# Altium PCB ARMBrain.PcbDoc
Units mil, origin at the board's own origin, x right, y up, seen from the top; angles counter-clockwise.
Board outline 6000 x 4000 mil, 2 copper layers (Top Layer, Bottom Layer); 65 components, 78 nets, 383 pads, 0 vias.
Unrouted connection lines stored in the file: 120.
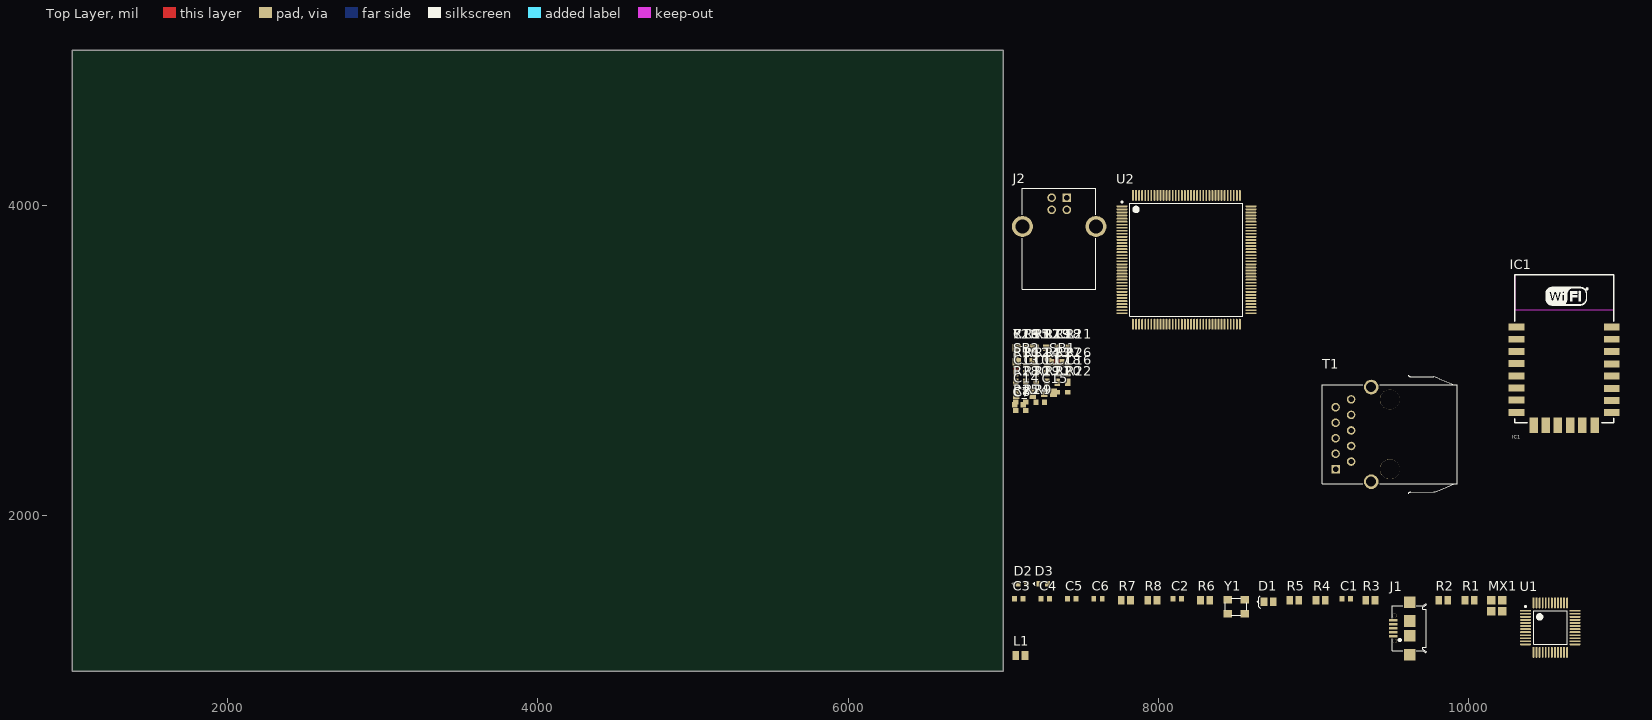
[diagram p0: Top Layer view]
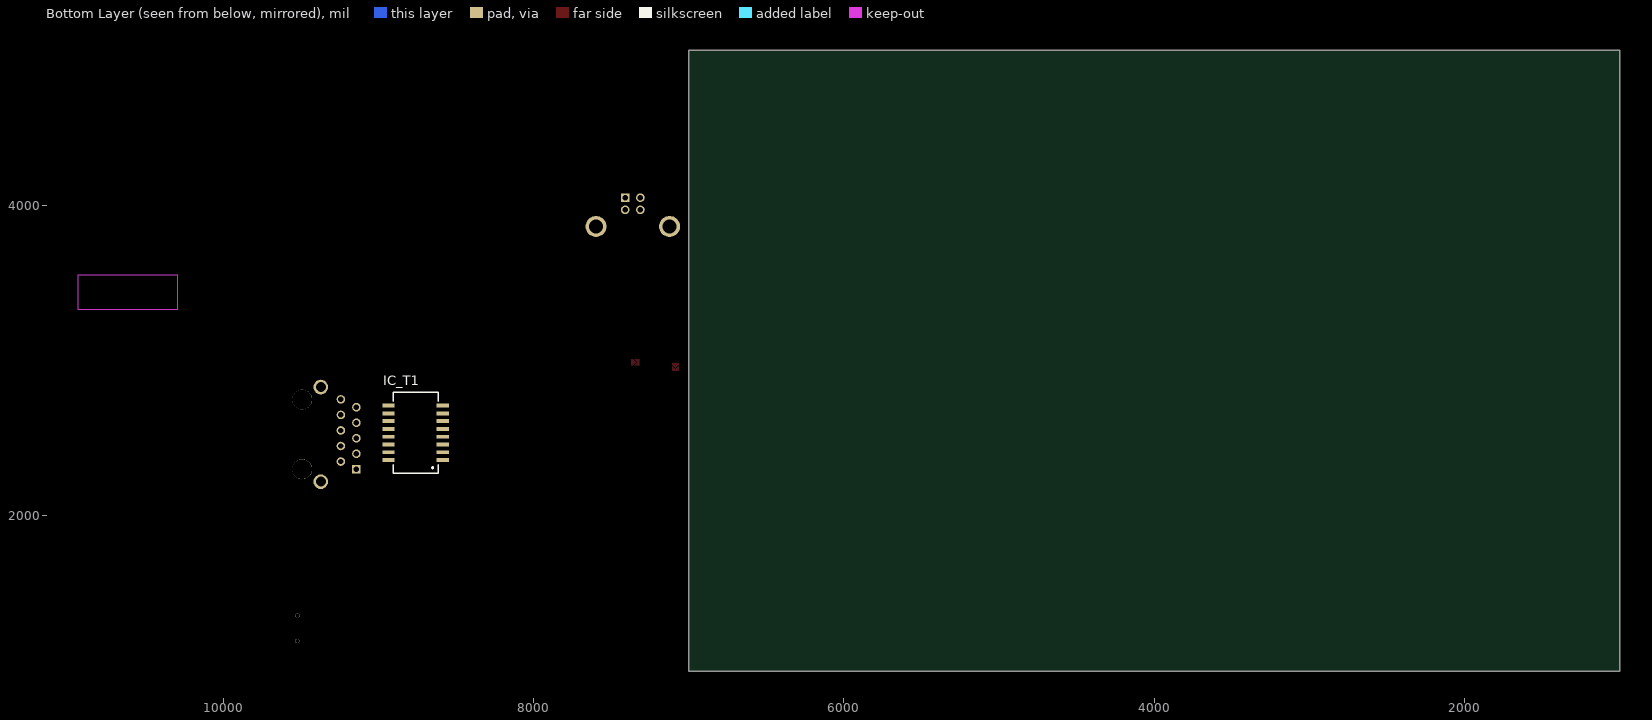
[diagram p1: Bottom Layer view, seen from below]

## Layer stack, top to bottom
Top Solder: solder mask 0.4, Solder Resist, Dk 3.5
Top Layer: signal copper 1.4
Dielectric 1: dielectric 12.6, FR-4, Dk 4.8
Bottom Layer: signal copper 1.4
Bottom Solder: solder mask 0.4, Solder Resist, Dk 3.5

## Board outline
1000,1000 7000,1000 7000,5000 1000,5000

## Design rules (kind name [scope] priority, off if disabled: settings)
Clearance [All] p1: gap=10
DiffPairsRouting [All] p1: maxlimit=10 minlimit=10 mostfreqgap=10 toplayer_minwidth=15 toplayer_maxwidth=15 toplayer_prefwidth=15 bottomlayer_minwidth=15 bottomlayer_maxwidth=15 bottomlayer_prefwidth=15 maxuncoupledlength=500
PolygonConnect [All] p1: connectstyle=Relief reliefconductorwidth=10 reliefentries=4 polygonreliefangle="90 Angle" airgapwidth=10
RoomDefinition MCU [InComponentClass('MCU')] p1: confinementstyle=ConfineIn formatcopy=TRUE lockcomponents=FALSE outline 0,0 2000,0 2000,1000 0,1000
RoomDefinition Ethernet [InComponentClass('Ethernet')] p2: confinementstyle=ConfineIn formatcopy=TRUE lockcomponents=FALSE outline 7045,1060 7175,1060 7175,1240 7045,1240
RoomDefinition ESP8266 [InComponentClass('ESP8266')] p3: confinementstyle=ConfineIn formatcopy=TRUE lockcomponents=FALSE outline 0,0 2000,0 2000,1000 0,1000
RoomDefinition Debugging [InComponentClass('Debugging')] p4: confinementstyle=ConfineIn formatcopy=TRUE lockcomponents=FALSE outline 0,0 2000,0 2000,1000 0,1000
RoutingVias [All] p1: holewidth=28 width=50 viastyle="Through Hole" minholewidth=28 minwidth=50 maxholewidth=28 maxwidth=50
SolderMaskExpansion [All] p1: expansion=4
Width [All] p1: maxlimit=10 minlimit=10 preferedwidth=10
28 further rules are at their usual default settings.

## Classes and differential pairs
component class MCU: J2 U2
component class Ethernet: C8 C9 C10 C11 C12 C13 C14 C15 C16 C17 C18 C19 CN1 D2 D3 IC_T1 L1 R9 R10 R11 R12 R13 R14 R15 R16 R17 R18 R19 R20 R21 R22 R23 R24 R25 R26 R27 R28 R29 R30 SB1 SB2 T1 U3 U4 U5 X1 Y2
component class ESP8266: C7 IC1
component class Debugging: C1 C2 C3 C4 C5 C6 D1 J1 MX1 R1 R2 R3 R4 R5 R6 R7 R8 U1 Y1
differential pair TD: +TD_P -TD_N
differential pair RD: +RD_P -RD_N

## Components (designator, comment, footprint, x,y, rotation, side; value= is the part's Value field where it differs from the comment)
C1 "Cap" C0603 9210,1465 r0 top
C2 "Cap" C0603 8120,1465 r0 top
C3 "Cap" C0603 7100,1465 r0 top
C4 "Cap" C0603 7270,1465 r0 top
C5 "Cap" C0603 7440,1465 r0 top
C6 "Cap" C0603 7610,1465 r0 top
C7 "Cap" C0603 7100,2715 r0 top
C8 "100nF" C0603 7104.21,2715.78 r0 top
C9 "12pF" C0603 7171.46,3086.38 r0 top
C10 "470pF" C0603 7145.87,2895.54 r90 top
C11 "100nF" C0603 7213.11,2895.54 r90 top
C12 "100nF" C0603 7358.67,3060.79 r90 top
C13 "100nF" C0603 7078.62,2895.54 r90 top
C14 "1nF 2000V" C1206 7135.71,2786.96 r0 top
C15 "Cap" C0805 7293.5,2792.87 r0 top
C16 "1uF_X5R_0603" C0603 7414.84,2895.54 r90 top
C17 "100nF" C0603 7280.35,2895.54 r90 top
C18 "100nF" C0603 7347.6,2895.54 r90 top
C19 "12pF" C0603 7078.62,3060.79 r90 top
D1 "LED" 0805_Led 8710,1445 r0 top
D2 "LED_Green" 0603_LED 7121.97,1561.73 r0 top
D3 "LED_Yellow" 0603_LED 7258.15,1561.73 r0 top
IC1 "ESP8266 ESP-12-E" "ESP8266 ESP-12-E" 10960,2570 r0 top
IC_T1 "ETH_Transf_11FB-05NL" "ETH_Transf 11FB-05NL" 8760,2535 r0 bottom
J1 "Micro USB 2.0 SMT Type B Horizontal 5 Contacts" 629105136821 9610,1275 r90 top
J2 "USB 2.0 Type B Horizontal" 61400416121 7360,3785 r0 top
L1 "Ferrite_Bead" 0805 7110,1100 r0 top
MX1 "Matrix_Selector" Matrix_Selector 10180,1420 r0 top
R1 "Res" R0805 10005,1455 r0 top
R2 "Res" R0805 9835,1455 r0 top
R3 "Res" R0805 9365,1455 r0 top
R4 "Res" R0805 9045,1455 r0 top
R5 "Res" R0805 8875,1455 r0 top
R6 "Res" R0805 8300,1455 r0 top
R7 "Res" R0805 7790,1455 r0 top
R8 "Res" R0805 7960,1455 r0 top
R9 "50" R0603 7238.7,2731.1 r0 top
R10 "50" R0603 7078.62,2942.36 r90 top
R11 "10K" R0603 7414.84,3060.79 r90 top
R12 "10K" R0603 7145.87,2942.36 r90 top
R13 "10K" R0603 7280.35,2942.36 r90 top
R14 "50" R0603 7213.11,2942.36 r90 top
R15 "50" R0603 7145.87,3060.79 r90 top
R16 "33" R0603 7078.62,3060.79 r90 top
R17 "33" R0603 7213.11,3060.79 r90 top
R18 "10K" R0603 7347.6,3060.79 r90 top
R19 "75" R0603 7280.35,3060.79 r90 top
R20 "75" R0603 7347.6,2823.94 r90 top
R21 "75" R0603 7280.35,2823.94 r90 top
R22 "75" R0603 7414.84,2823.94 r90 top
R23 "12K1" R0805 7281.58,3052.91 r90 top
R24 "33" R0603 7145.87,2705.51 r90 top
R25 "1K5" R0603 7078.62,2705.51 r90 top
R26 "10K" R0603 7414.84,2942.36 r90 top
R27 "33" R0603 7347.6,2942.36 r90 top
R28 "270" R0603 7078.62,2823.94 r90 top
R29 "10K" R0603 7213.11,2823.94 r90 top
R30 "270" R0603 7145.87,2823.94 r90 top
SB1 "Open" SB_0603 7345,2990 r0 top
SB2 "Open" SB_0603 7085,2960 r90 top
T1 "RJ45" RJ45_ETH 9490,2525 r90 top
U1 "STM32F103C8T6" STM-LQFP48_N 10525,1280 r0 top
U2 "STM32F407ZGT6" STM-LQFP144_N 8180,3650 r0 top
Y1 "XTAL 8MHz" SMD-3225_4P 8500,1415 r0 top
Y2 "XTAL_25MHz" SMD-3225_4P 7141.56,3037.38 r0 top

## Footprints (in the part's own frame and the unit in brackets; to place one, negate y for a bottom-side part, rotate by r counter-clockwise, add the part's x,y. Pads: shape width x height; smd on the part's side, far side on the other; paste and mask are expansions set on the pad)
0603_LED [mm] "0603, Body 1.6x0.8mm, IPC High Density"
  rect 0.8x0.9 smd: 1(-0.7,0) 2(0.7,0)
  silkscreen extent -1.65,-0.25 -1.4,0.25, body extent -0.87,-0.48 0.87,0.48, height 1.3
0805 [mm] "Chip Capacitor, Body 2.0x1.3mm, IPC High Density"
  rect 1.1x1.4 smd: 1(-0.75,0) 2(0.75,0)
  body extent -1.1,-0.72 1.1,0.72, height 1.4
0805_Led [mm] "Chip Capacitor, Body 2.0x1.3mm, IPC High Density"
  rect 1.1x1.4 smd: 1(-0.75,0) 2(0.75,0)
  silkscreen extent -1.91,-1.02 -1.4,1.02, body extent -1.1,-0.72 1.1,0.72, height 1.4
61400416121 [mm] "USB 2.0 Type B Horizontal"
  rect 1.42x1.42 hole 0.92: 1(1.25,6.74)
  round 1.42 hole 0.92: 2(-1.25,6.74) 3(-1.25,4.74) 4(1.25,4.74)
  round 3.45 hole 2.3: Shell(-6.02,2.03) Shell(6.02,2.03)
  silkscreen extent -6.02,-8.25 6.02,8.25, body extent -7.48,-8.25 7.48,8.25, height 11.1
629105136821 [mm] "Micro USB 2.0 SMT Type B Horizontal 5 Contacts"
  rect 0.4x1.35 smd: 1(-1.3,2.475) 2(-0.65,2.475) 3(0,2.475) 4(0.65,2.475) 5(1.3,2.475)
  rect 1.9x1.9 smd: Shell(-4.3,-0.2) Shell(-1.2,-0.2) Shell(1.2,-0.2) Shell(4.3,-0.2)
  round 0.7 hole 0.7 unplated: ""(-2.075,2.25) ""(2.075,2.25)
  silkscreen extent -4,-2.95 4,2.65, body extent -4,-2.95 4,2.97, height 2.75
C0603 [mm] "0603, Body 1.6x0.8mm, IPC High Density"
  rect 0.8x0.9 smd: 1(-0.7,0) 2(0.7,0)
  body extent -0.87,-0.48 0.87,0.48, height 1.3
C0805 [mm] "Chip Capacitor, Body 2.0x1.3mm, IPC High Density"
  rect 1.1x1.4 smd: 1(-0.75,0) 2(0.75,0)
  body extent -1.1,-0.72 1.1,0.72, height 1.4
C1206 [mm] "Chip Capacitor, Body 3.2x1.6mm, IPC High Density"
  rect 1.1x1.7 smd: 1(-1.35,0) 2(1.35,0)
  silkscreen extent -0.4,-0.75 0.4,0.75, body extent -1.7,-0.9 1.7,0.9, height 1.3
"ESP8266 ESP-12-E" [mil] "ESP8266 ESP-12-E"
  rect 100x45 smd: 1(-653,646) 2(-653,568) 3(-653,489) 4(-653,411) 5(-653,331) 6(-653,253) 7(-653,175) 8(-653,96) 15(-38,95) 16(-38,174) 17(-38,252) 18(-39,331) 19(-39,410) 20(-39,488) 21(-39,568) 22(-39,646)
  rect 55x100 smd: 9(-543,14) 10(-465,14) 11(-387,14) 12(-307,14) 13(-229,14) 14(-149,14)
  Keep-Out Layer region: -664,759 -25,759 -25,984 -664,984
  silkscreen extent -665,30 -25,985, body extent -661,35 -31,980, height 86
"ETH_Transf 11FB-05NL" [mm] "RJ45 Ethernet transformer [11FB-05NL]"
  rect 2x0.635 smd: 1(-4.445,4.445) 2(-4.445,3.175) 3(-4.445,1.905) 4(-4.445,0.635) 5(-4.445,-0.635) 6(-4.445,-1.905) 7(-4.445,-3.175) 8(-4.445,-4.445) 9(4.445,-4.445) 10(4.445,-3.175) 11(4.445,-1.905) 12(4.445,-0.635) 13(4.445,0.635) 14(4.445,1.905) 15(4.445,3.175) 16(4.445,4.445)
  silkscreen extent -3.68,-6.6 3.68,6.6
Matrix_Selector [mil] "Selector for Crossing RXTX etc"
  rect 55.12x55.12 smd: 1(-35,35) 2(35,-35) 3(35,35) 4(-35,-35)
R0603 [mm] "0603, Body 1.6x0.8mm, IPC High Density"
  rect 0.8x0.9 smd: 1(-0.7,0) 2(0.7,0)
  body extent -0.87,-0.48 0.87,0.48, height 1.3
R0805 [mm] "Chip Resistor, Body 2.0x1.3mm, IPC High Density"
  rect 1.1x1.4 smd: 1(-0.75,0) 2(0.75,0)
  body extent -1.1,-0.72 1.1,0.72, height 1.4
RJ45_ETH [mm] "LAN Transformer, body 21.84x16.13mm"
  round 1.4 hole 0.89: 1(-4.445,6.33) 2(-3.175,8.87) 3(-1.905,6.33) 4(-0.635,8.87) 5(0.635,6.33) 6(1.905,8.87) 7(3.175,6.33) 8(4.445,8.87) B2(5.715,6.33)
  rect 1.4x1.4 hole 0.89: B1(-5.715,8.87)
  round 3.25 hole 3.25 unplated: MH1(-5.715,-0.02) MH2(5.715,-0.02)
  round 2.4 hole 1.63: S1(-7.745,3.03) S2(7.745,3.03)
  silkscreen extent -9.68,-11.02 9.68,11.02, body extent -9.67,-10.94 9.67,10.9, height 15.8
SB_0603 [mil] "Jumper"
  rect 32x40 smd: 1(33.75,0) 2(-33.75,0)
  Top Layer region: -26.25,0 -16.25,0 3.75,-20 -26.25,-20
  Top Layer region: -26.25,0 -16.25,0 3.75,20 -26.25,20
  Top Layer region: 23.75,20 13.75,20 -6.25,0 13.75,-20 23.75,-20
SMD-3225_4P [mil]
  rect 55.12x47.24 smd: 1(-55,-45) 2(55,-45) 3(55,45) 4(-55,45)
  silkscreen extent -70,-55 70,55
STM-LQFP48_N [mm] "QFP, 48-Leads, Body 7x7mm, Pitch 0.5mm, IPC Medium Density"
  oval 1.8x0.3 smd: 1(-4.05,2.75) 2(-4.05,2.25) 3(-4.05,1.75) 4(-4.05,1.25) 5(-4.05,0.75) 6(-4.05,0.25) 7(-4.05,-0.25) 8(-4.05,-0.75) 9(-4.05,-1.25) 10(-4.05,-1.75) 11(-4.05,-2.25) 12(-4.05,-2.75) 25(4.05,-2.75) 26(4.05,-2.25) 27(4.05,-1.75) 28(4.05,-1.25) 29(4.05,-0.75) 30(4.05,-0.25) 31(4.05,0.25) 32(4.05,0.75) 33(4.05,1.25) 34(4.05,1.75) 35(4.05,2.25) 36(4.05,2.75)
  oval 0.3x1.8 smd: 13(-2.75,-4.05) 14(-2.25,-4.05) 15(-1.75,-4.05) 16(-1.25,-4.05) 17(-0.75,-4.05) 18(-0.25,-4.05) 19(0.25,-4.05) 20(0.75,-4.05) 21(1.25,-4.05) 22(1.75,-4.05) 23(2.25,-4.05) 24(2.75,-4.05) 37(2.75,4.05) 38(2.25,4.05) 39(1.75,4.05) 40(1.25,4.05) 41(0.75,4.05) 42(0.25,4.05) 43(-0.25,4.05) 44(-0.75,4.05) 45(-1.25,4.05) 46(-1.75,4.05) 47(-2.25,4.05) 48(-2.75,4.05)
  silkscreen extent -4.17,-2.75 2.75,3.57, body extent -3.5,-3.5 3.5,3.5, height 1.6
STM-LQFP144_N [mm] "Thin QFP, 144-Leads, Body 20x20mm, Pitch 0.5mm, IPC Medium Density"
  oval 1.8x0.3 smd: 1(-10.55,8.75) 2(-10.55,8.25) 3(-10.55,7.75) 4(-10.55,7.25) 5(-10.55,6.75) 6(-10.55,6.25) 7(-10.55,5.75) 8(-10.55,5.25) 9(-10.55,4.75) 10(-10.55,4.25) 11(-10.55,3.75) 12(-10.55,3.25) 13(-10.55,2.75) 14(-10.55,2.25) 15(-10.55,1.75) 16(-10.55,1.25) 17(-10.55,0.75) 18(-10.55,0.25) 19(-10.55,-0.25) 20(-10.55,-0.75) 21(-10.55,-1.25) 22(-10.55,-1.75) 23(-10.55,-2.25) 24(-10.55,-2.75) 25(-10.55,-3.25) 26(-10.55,-3.75) 27(-10.55,-4.25) 28(-10.55,-4.75) 29(-10.55,-5.25) 30(-10.55,-5.75) 31(-10.55,-6.25) 32(-10.55,-6.75) 33(-10.55,-7.25) 34(-10.55,-7.75) 35(-10.55,-8.25) 36(-10.55,-8.75) 73(10.55,-8.75) 74(10.55,-8.25) 75(10.55,-7.75) 76(10.55,-7.25) 77(10.55,-6.75) 78(10.55,-6.25) 79(10.55,-5.75) 80(10.55,-5.25) 81(10.55,-4.75) 82(10.55,-4.25) 83(10.55,-3.75) 84(10.55,-3.25) 85(10.55,-2.75) 86(10.55,-2.25) 87(10.55,-1.75) 88(10.55,-1.25) 89(10.55,-0.75) 90(10.55,-0.25) 91(10.55,0.25) 92(10.55,0.75) 93(10.55,1.25) 94(10.55,1.75) 95(10.55,2.25) 96(10.55,2.75) 97(10.55,3.25) 98(10.55,3.75) 99(10.55,4.25) 100(10.55,4.75) 101(10.55,5.25) 102(10.55,5.75) 103(10.55,6.25) 104(10.55,6.75) 105(10.55,7.25) 106(10.55,7.75) 107(10.55,8.25) 108(10.55,8.75)
  oval 0.3x1.8 smd: 37(-8.75,-10.55) 38(-8.25,-10.55) 39(-7.75,-10.55) 40(-7.25,-10.55) 41(-6.75,-10.55) 42(-6.25,-10.55) 43(-5.75,-10.55) 44(-5.25,-10.55) 45(-4.75,-10.55) 46(-4.25,-10.55) 47(-3.75,-10.55) 48(-3.25,-10.55) 49(-2.75,-10.55) 50(-2.25,-10.55) 51(-1.75,-10.55) 52(-1.25,-10.55) 53(-0.75,-10.55) 54(-0.25,-10.55) 55(0.25,-10.55) 56(0.75,-10.55) 57(1.25,-10.55) 58(1.75,-10.55) 59(2.25,-10.55) 60(2.75,-10.55) 61(3.25,-10.55) 62(3.75,-10.55) 63(4.25,-10.55) 64(4.75,-10.55) 65(5.25,-10.55) 66(5.75,-10.55) 67(6.25,-10.55) 68(6.75,-10.55) 69(7.25,-10.55) 70(7.75,-10.55) 71(8.25,-10.55) 72(8.75,-10.55) 109(8.75,10.55) 110(8.25,10.55) 111(7.75,10.55) 112(7.25,10.55) 113(6.75,10.55) 114(6.25,10.55) 115(5.75,10.55) 116(5.25,10.55) 117(4.75,10.55) 118(4.25,10.55) 119(3.75,10.55) 120(3.25,10.55) 121(2.75,10.55) 122(2.25,10.55) 123(1.75,10.55) 124(1.25,10.55) 125(0.75,10.55) 126(0.25,10.55) 127(-0.25,10.55) 128(-0.75,10.55) 129(-1.25,10.55) 130(-1.75,10.55) 131(-2.25,10.55) 132(-2.75,10.55) 133(-3.25,10.55) 134(-3.75,10.55) 135(-4.25,10.55) 136(-4.75,10.55) 137(-5.25,10.55) 138(-5.75,10.55) 139(-6.25,10.55) 140(-6.75,10.55) 141(-7.25,10.55) 142(-7.75,10.55) 143(-8.25,10.55) 144(-8.75,10.55)
  silkscreen extent -10.67,-9.25 9.25,9.57, body extent -10,-10 10,10, height 1.6

## Part data
C1 C2 C3 C4 C5 C6 C7 C15: "Capacitor"
C8 C9 C10 C11 C12 C13 C17 C18 C19: library part Capacitor_ST, "Capacitor 0402 / 0603 / 0805"
C14: library part Capacitor_ST, "Capacitor 0402 / 0603 / 0805/ 1206"
C16: library part "CAP SMD 0603  X5R 1µF 25V 10%", "0603  X5R 1µF"
D1: "SMD LED"
D2 D3: library part LED, "SMD LED"
J1: "Micro USB 2.0 SMT Type B Horizontal 5 Contacts WR-COM"
J2: "USB 2.0 Type B Horizontal WR-COM"
R1 R2 R3 R4 R5 R6 R7 R8: "Resistor"
R9 R10 R14 R15: library part Res_50_1%_0603, "Resistor,50,0603,1%,YAGEO"
R11 R12 R13 R18 R26 R28 R29 R30: library part Resistor_ST, "Resistor 0402 / 0603 / 0805"
R16 R17 R24 R27: library part Res_33_1%_0402, "Resistor,33,0402,1%,YAGEO"
R19 R20 R21 R22: library part Res_75_1%_0603, "Resistor,75,0603,1%,YAGEO"
R23: library part Res_12K1_1%_0603, "Resistor,12K1,0603,1%,VISHAY"
R25: library part Res_1K5_1%_0402, "Resistor,1K5,0402,1%,YAGEO"
SB1 SB2: library part "Circuit Breaker", "Circuit Breaker"
T1: "WE-RJ45 LAN Transformer, 10/100 Base-T, THT, Port 1x1, Tab Up"
U1: "ARM Cortex-M3 32-bit MCU, 64 KB Flash, 20 KB Internal RAM, 37 I/Os, 48-pin LQFP, -40 to 85 degC, Tray"
U2: "ARM Cortex-M4 32-bit MCU+FPU, 210 DMIPS, 1024 kB Flash, 192 kB Internal RAM, 114 I/Os, 144-pin LQFP, -40 to 85 degC, Tray"
Y1 Y2: library part XTAL_SMD, "Crystal"

## Nets (pads, with @x,y where several pads share a name; then routed paths per layer and width w, separated by ;. In a path a pad name is that pad's centre, name@x,y a point inside that pad or via, vN(x,y) a via of type N, cw(c..) or ccw(c..) an arc to the next point about the centre after c; other vN are vias at no path point)
3V3: C3.2 C4.2 C5.2 C6.2 R5.2 R7.1 R8.1 U1.1 U1.9 U1.24 U1.36 U1.48
+3V3_PER: C11.2 L1.2 R11.1 R12.1 R13.1 R25.2 R26.1
D+: J2.3 U2.104
D-: J2.2 U2.103
DBG_BOOT0: R3.1 U1.44
DBG_BOOT1: R1.1 U1.20
DBG_D+: R6.2 R7.2 U1.33
DBG_D-: R4.2 U1.32
DBG_RST: R5.1 U1.7
DBG_RXD: MX1.2
DBG_SWCLK: U1.37
DBG_SWDIO: U1.34
DBG_TXD: MX1.1
DBG_USB+: J1.3 R6.1
DBG_USB-: J1.2 R4.1
DBG_VBUS: J1.1 R2.2
EGND: C14.1 SB1.1 SB2.1
MCU_RX6: U2.97
MCU_RX6: IC1.22
MCU_TX6: U2.96
MCU_TX6: IC1.21
NetC1_2: C1.2 U1.5 Y1.1
NetC2_2: C2.2 U1.6 Y1.3
NetC8_2: C8.2 C12.2 C13.2 C15.2 C17.2 C18.2 IC_T1.2 IC_T1.7 L1.1 R9.2 R10.2 R14.2 R15.2
NetC9_1: C9.1 Y2.3
NetC10_2: C10.2 C16.1
NetC14_2: C14.2 R19.1 R20.1 R21.1 R22.1
NetC19_1: C19.1 Y2.1
NetD1_1: D1.1 U1.2
NetD1_2: D1.2 R8.2
NetD2_1: D2.1 R30.1
NetD2_2: D2.2 R29.1
NetD3_1: D3.1 R28.1
NetD3_2: D3.2
NetIC_T1_9: IC_T1.9 T1.6
NetIC_T1_10: IC_T1.10 R19.2
NetIC_T1_11: IC_T1.11 T1.3
NetIC_T1_14: IC_T1.14 T1.2
NetIC_T1_15: IC_T1.15 R21.2
NetIC_T1_16: IC_T1.16 T1.1
NetMX1_3: MX1.3 U1.12
NetMX1_4: MX1.4 U1.13
NetR11_2: R11.2 R16.1
NetR12_2: R12.2 R17.1
NetR13_2: R13.2 R24.1
NetR16_2: R16.2 U2.44
NetR17_2: R17.2 U2.45
NetR18_1: R18.1
NetR20_2: R20.2 T1.4 T1.5
NetR22_2: R22.2 T1.7 T1.8
NetR23_1: R23.1
NetR24_2: R24.2 U2.43
NetR25_1: R25.1 U2.36
NetR26_2: R26.2 R27.1
NetR27_2: R27.2 U2.35
NetU2_25: U2.25
NetU2_27: U2.27
NetU2_74: U2.74
NetU2_126: U2.126
NetU2_128: U2.128
RD_N: IC_T1.8 R9.1
RD_P: IC_T1.6 R14.1
RJ45_SHIELD: C1.1 C2.1 C3.1 C4.1 C5.1 C6.1 C7.1 C8.1 C9.2 C10.1 C11.1 C12.1 C13.1 C15.1 C16.2 C17.1 C18.1 C19.2 IC1.15 J1.5 J1.Shell J2.4 R1.2 R2.1 R3.2 R18.2 R23.2 R28.2 R29.2 R30.2 SB1.2 SB2.2 T1.S1 T1.S2 U1.8 U1.23 U1.35 U1.47
SWCLK: U1.15
SWCLK: U2.109
SWDIO: U1.27
SWDIO: U2.105
TD_N: IC_T1.3 R10.1
TD_P: IC_T1.1 R15.1
VCC33: C7.2 IC1.8
WIFI_EN: IC1.3
WIFI_EN: U2.57
WIFI_GPIO0: IC1.18
WIFI_GPIO0: U2.54
WIFI_GPIO2: IC1.17
WIFI_GPIO2: U2.55
WIFI_RST: IC1.1
WIFI_RST: U2.56
pads on no net: IC1.2 IC1.4 IC1.5 IC1.6 IC1.7 IC1.9 IC1.10 IC1.11 IC1.12 IC1.13 IC1.14 IC1.16 IC1.19 IC1.20 IC_T1.4 IC_T1.5 IC_T1.12 IC_T1.13 J1. J1.4 J2.1 J2.Shell T1.B1 T1.B2 T1.MH1 T1.MH2 U1.3 U1.4 U1.10 U1.11 U1.14 U1.16 U1.17 U1.18 U1.19 U1.21 U1.22 U1.25 U1.26 U1.28 U1.29 U1.30 U1.31 U1.38 U1.39 U1.40 U1.41 U1.42 U1.43 U1.45 U1.46 U2.1 U2.2 U2.3 U2.4 U2.5 U2.6 U2.7 U2.8 U2.9 U2.10 U2.11 U2.12 U2.13 U2.14 U2.15 U2.16 U2.17 U2.18 U2.19 U2.20 U2.21 U2.22 U2.23 U2.24 U2.26 U2.28 U2.29 U2.30 U2.31 U2.32 U2.33 U2.34 U2.37 U2.38 U2.39 U2.40 U2.41 U2.42 U2.46 U2.47 U2.48 U2.49 U2.50 U2.51 U2.52 U2.53 U2.58 U2.59 U2.60 U2.61 U2.62 U2.63 U2.64 U2.65 U2.66 U2.67 U2.68 U2.69 U2.70 U2.71 U2.72 U2.73 U2.75 U2.76 U2.77 U2.78 U2.79 U2.80 U2.81 U2.82 U2.83 U2.84 U2.85 U2.86 U2.87 U2.88 U2.89 U2.90 U2.91 U2.92 U2.93 U2.94 U2.95 U2.98 U2.99 U2.100 U2.101 U2.102 U2.106 U2.107 U2.108 U2.110 U2.111 U2.112 U2.113 U2.114 U2.115 U2.116 U2.117 U2.118 U2.119 U2.120 U2.121 U2.122 U2.123 U2.124 U2.125 U2.127 U2.129 U2.130 U2.131 U2.132 U2.133 U2.134 U2.135 U2.136 U2.137 U2.138 U2.139 U2.140 U2.141 U2.142 U2.143 U2.144 Y1.2 Y1.4 Y2.2 Y2.4

## Text inside footprints (layer, text, board x,y; h text height)
IC1: Mechanical 15 "ANTENNA AREA" at 10307.04,3530.59 h10; Mechanical 13 "CUTOUT POLYGON" at 10307.04,3510.59 h10
J1: Mechanical 15 "PCB Edge" at 9706.46,1204.13 h39.37 r90